# Altium PCB 小四轴.PcbDoc
Units mm, origin at the board's own origin, x right, y up, seen from the top; angles counter-clockwise.
Board outline 152.4 x 101.6 mm, 2 copper layers (Top Layer, Bottom Layer); 77 components, 60 nets, 283 pads, 162 vias.
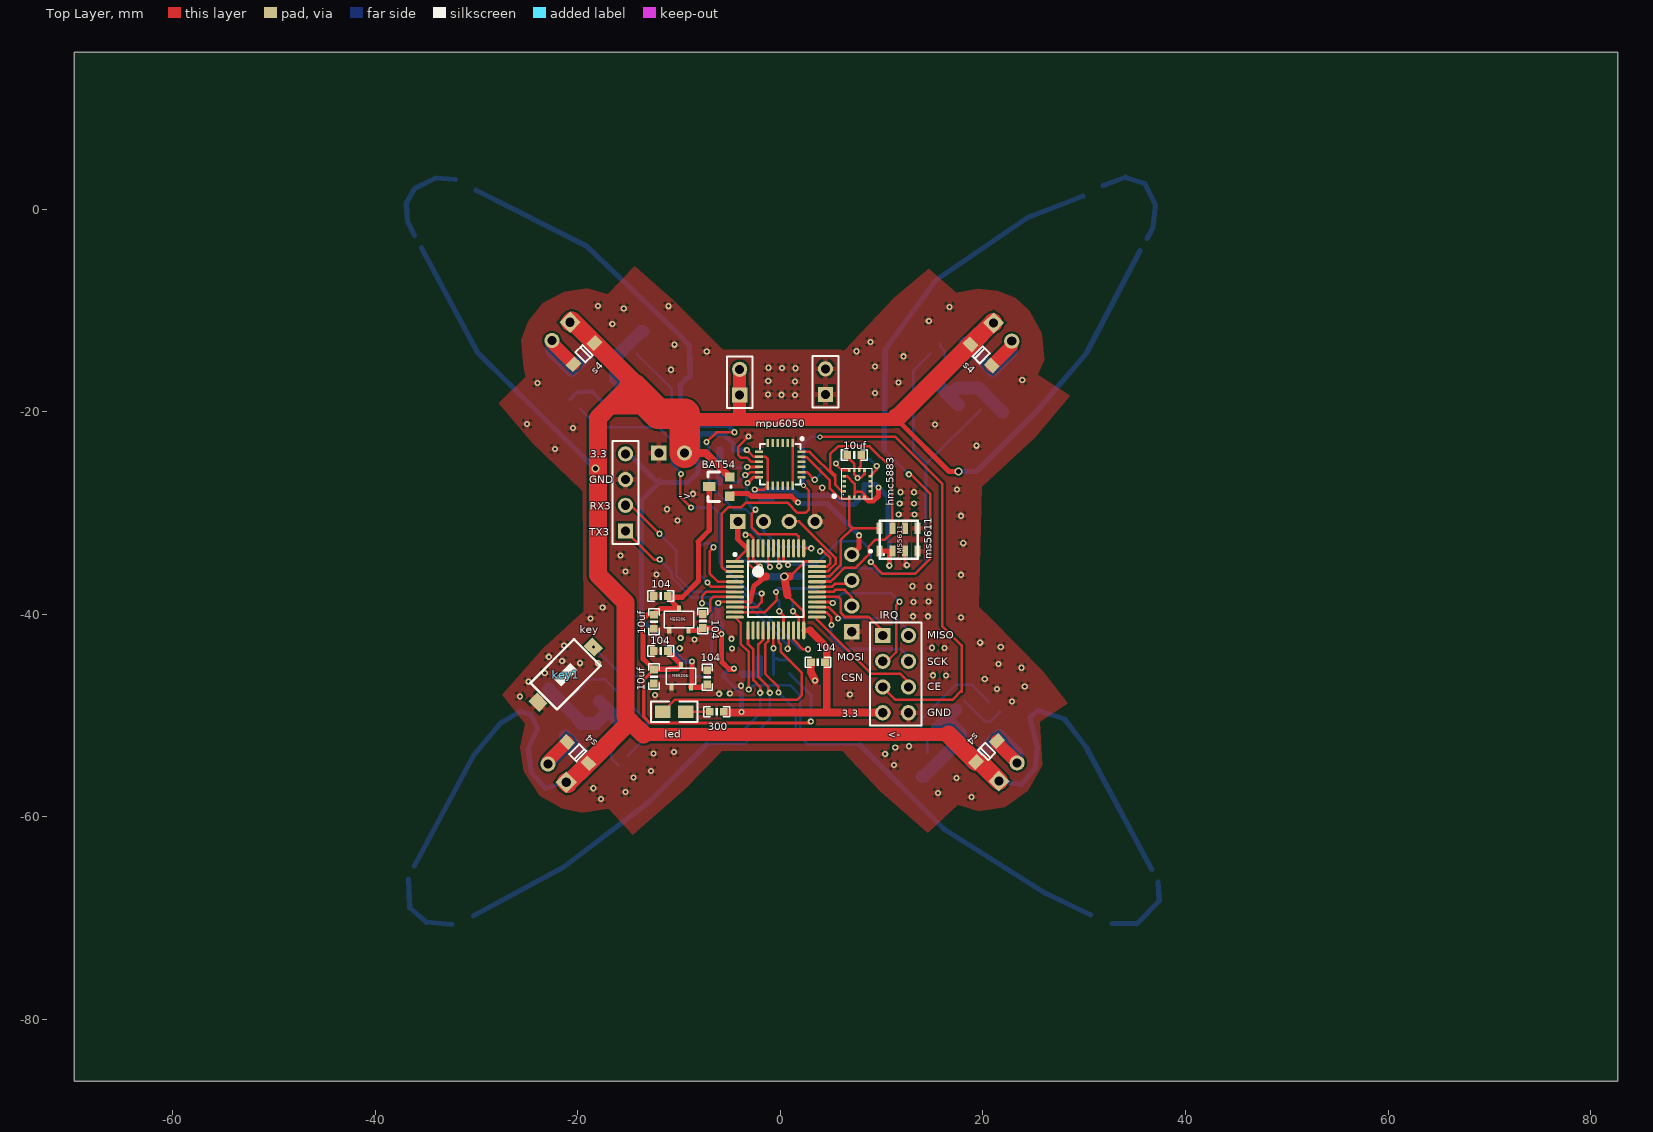
[diagram p0: Top Layer view]
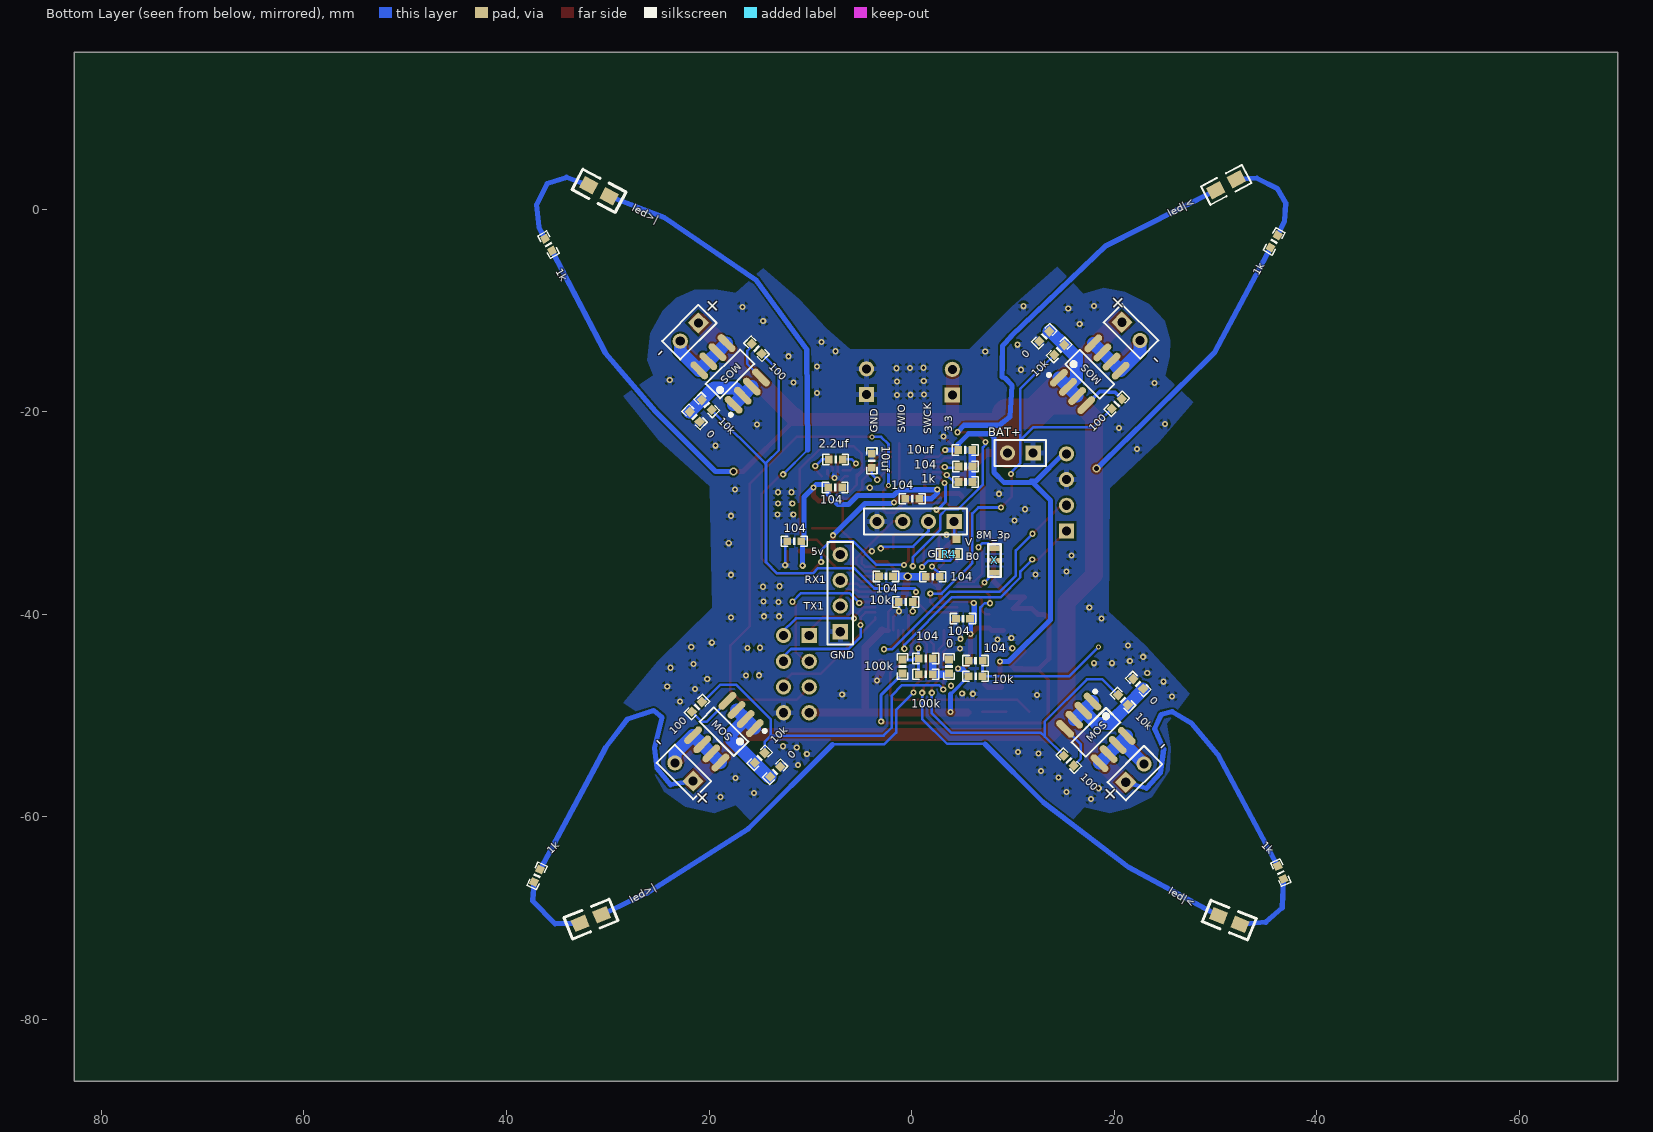
[diagram p1: Bottom Layer view, seen from below]

## Layer stack, top to bottom
Top Layer: signal copper 0.0356
Dielectric: dielectric 0.32, FR-4, Dk 4.8
Bottom Layer: signal copper 0.0356

## Board outline
-69.726,-86.105 82.674,-86.105 82.674,15.495 -69.726,15.495

## Design rules (kind name [scope] priority, off if disabled: settings)
Clearance futong [All vs InPolygon] p1: gap=0.203
MinimumSolderMaskSliver [All] p1: minsoldermaskwidth=0
PolygonConnect [All] p1: connectstyle=Relief reliefconductorwidth=0.508 reliefentries=4 polygonreliefangle="90 Angle" airgapwidth=0.254
RoutingVias [All] p1: holewidth=0.3 width=0.5 viastyle="Through Hole" minholewidth=0.3 minwidth=0.5 maxholewidth=0.8 maxwidth=1.3
SilkToSilkClearance [All] p1: silktosilkclearance=0
SilkToSolderMaskClearance [IsPad] p1: minsilkscreentomaskgap=0 clearancetoexposedcopper=TRUE
SolderMaskExpansion [All] p1: expansion=0.102
Width [All] p1: maxlimit=4 minlimit=0.254 preferedwidth=0.254
25 further rules are at their usual default settings.

## Classes and differential pairs
component class 小四轴: *1 arctory1 C1 C2 C3 C4 C5 C6 C7 C8 C9 C10 C11 C14 C16 C17 CRYSTAL1 D1 D6 D7 D8 D9 JP1 JP2 JP4 JP6 JP7 ms5611 nrf R1 R2 R4 R5 R6 R10 R11 R13 R14 R15 R16 R17 R18 R19 R20 U1 U2 U3

## Components (designator, comment, footprint, x,y, rotation, side; value= is the part's Value field where it differs from the comment)
*1 "HMC5883L" hmc5883l 9.05,-28.599 r90 top
arctory1 "MS5611" MS5611 12.301,-29.509 r90 top
C1 "10uf" 0603P -12.497,-40.731 r90 top
C2 "104" 0603P -11.829,-38.196 r0 top
C3 "104" 0603P -7.663,-40.66 r270 top
C4 "104" 0603P -0.069,-28.595 r180 bottom
C5 "10UF" 0603P -5.301,-23.769 r180 bottom
C6 "10uf" 0603P 7.3,-24.275 r180 top
C7 "104" 0603p 11.59,-32.786 r0 bottom
C8 "10uf" 0603P -12.497,-46.141 r90 top
C9 "104" 0603P -11.811,-43.626 r0 top
C10 "104" 0603P -7.232,-46.222 r270 top
C11 "104" 0603P 7.55,-27.475 r180 bottom
C12 "10UF" 0603P 3.919,-24.835 r270 bottom
C13 "104" 0603P -5.327,-25.394 r180 bottom
C14 "2.2uf" 0603P 7.5,-24.707 r180 bottom
C17 "104" 0603P -6.319,-44.573 r180 bottom
C18 "104" 0603P -1.402,-44.37 r0 bottom
C22 "104" 0603P 3.7,-44.725 r0 top
C23 "104" 0603P 2.525,-36.25 r180 bottom
C24 "104" 0603P -2.1,-36.3 r0 bottom
C25 "104" 0603P -5.075,-40.425 r180 bottom
D1 "BAT54C" SOT23 -6.012,-27.401 r90 top
D2 "发光二极管" 0805#1 -9.34,-49.626 r180 top
D3 "发光二极管" 0805#1 -32.075,2.95 r332 bottom
D4 "发光二极管" 0805#2 31.875,2.35 r208 bottom
D5 "发光二极管" 0805#2 32.725,-70.525 r158 bottom
D6 "S4" LC-SOD-123 -19.397,-14.261 r225 top
D7 "S4" LC-SOD-123 19.824,-14.383 r315 top
D8 "S4" LC-SOD-123 20.358,-53.544 r45 top
D9 "S4" LC-SOD-123 -20.012,-53.661 r135 top
D10 "发光二极管" 0805#2 -32.425,-70.625 r22 bottom
HC1 "HC05" HDR1X4 -15.3,-31.775 r90 top
JP1 "BAT" HDR1X2 -12.007,-24.073 r0 bottom
JP2 "HEADER 4" HDR1X4 -4.209,-30.83 r0 bottom
JP3 "HEADER 4" HDR1X4 7.043,-41.726 r90 bottom
JP4 "MOTOR1" HDR1X2 -20.768,-11.163 r225 bottom
JP5 "MOTOR2" HDR1X2 21.043,-11.234 r315 bottom
JP6 "MOTOR3" HDR1X2 21.577,-56.465 r45 bottom
JP7 "MOTOR4" HDR1X2 -21.155,-56.582 r135 bottom
key1 "KEY" 贴片按键6.1x3.7 -17.771,-45.079 r225 top
nrf "nrf24l01" HDR2X4 10.1,-42.1 r270 top
P4 "Header 2" HDR1X2 4.45,-18.3 r90 top
P5 "Header 2" HDR1X2 -4.025,-18.35 r90 top
Q1 "SI2302\" LC-SOIC-8_150mil -17.593,-16.293 r225 bottom
Q2 "SI2302\" LC-SOIC-8_150mil 17.919,-16.263 r135 bottom
Q3 "SI2302\" LC-SOIC-8_150mil 18.529,-51.588 r45 bottom
Q4 "SI2302\" LC-SOIC-8_150mil -18.208,-51.654 r315 bottom
R1 "0" 0603P -3.701,-45.155 r90 bottom
R2 "1k" 0603P -5.327,-26.944 r0 bottom
R3 "10k" 0603P 0.575,-38.775 r180 bottom
R4 "10k" 0603P -3.725,-34.05 r180 bottom
R5 "10k" 0603P -6.319,-46.122 r0 bottom
R6 "300" 0603P -6.292,-49.626 r0 top
R7 "1k" 0603P -35.8,-3.175 r300 bottom
R8 "1k" 0603P 35.85,-3.5 r240 bottom
R9 "1k" 0603P 36.975,-65.825 r115 bottom
R10 "100K" 0603P 0.896,-45.155 r270 bottom
R11 "100K" 0603P -1.402,-45.919 r0 bottom
R12 "1k" 0603P -36.45,-65.5 r65 bottom
R13 "100" 0603P -20.26,-19.214 r315 bottom
R14 "100" 0603P 15.303,-13.774 r225 bottom
R15 "100" 0603P 21.196,-49.15 r135 bottom
R16 "100" 0603P -15.525,-54.45 r45 bottom
R17 "10k" 0603P -14.575,-13.9 r135 bottom
R18 "10k" 0603P 20.225,-19.325 r45 bottom
R19 "10k" 0603P 15,-54.175 r315 bottom
R20 "10k" 0603P -20.875,-48.45 r225 bottom
R22 "0" 0603P -13.1,-12.55 r315 bottom
R23 "0" 0603P 21.425,-20.5 r225 bottom
R24 "0" 0603P 13.475,-55.55 r135 bottom
R25 "0" 0603P -22.375,-46.875 r45 bottom
U1 "ME6206" ME6206 -11.481,-41.315 r0 top
U2 "MPU6050" QFN24 -0.018,-25.202 r270 top
U3 "ME6206" ME6206 -11.252,-46.903 r0 top
U4 "STM32F103C8T6" LQFP48_N -0.45,-37.535 r0 top
X "XTAL" 三脚晶振 -8.2,-33.475 r270 bottom

## Footprints (in the part's own frame and the unit in brackets; to place one, negate y for a bottom-side part, rotate by r counter-clockwise, add the part's x,y. Pads: shape width x height; smd on the part's side, far side on the other; paste and mask are expansions set on the pad)
0603P [mil]
  rect 30x30 smd: 1(-27,0) 2(27.5,-0.06)
  silkscreen extent -50,-20 50,20
0603p [mil]
  rect 30x30 smd: 1(-27,0) 2(27.5,-0.06)
  silkscreen extent -50,-20 50,20
0805#1 [mil]
  rect 60x50 smd: 1(0,0) 2(90,0)
  silkscreen extent -45,-40 135,40
0805#2 [mil]
  rect 60x50 smd: 1(0,-0.06) 2(90,-0.06)
  silkscreen extent -50,-45 140,45
HDR1X2 [mm] "Connector; Header; 2 Position"
  rect 1.5x1.5 hole 0.9: 1(0,0)
  round 1.5 hole 0.9: 2(2.54,0)
  silkscreen extent -1.27,-1.27 3.81,1.27
HDR1X4 [mm]
  rect 1.5x1.5 hole 0.9: 1(0,0)
  round 1.5 hole 0.9: 2(2.54,0) 3(5.08,0) 4(7.62,0)
  silkscreen extent -1.27,-1.27 8.89,1.27
HDR2X4 [mm] "Connector; Header; 4x2 Position"
  rect 1.5x1.5 hole 0.9: 1(0,0)
  round 1.5 hole 0.9: 2(0,2.54) 3(2.54,0) 4(2.54,2.54) 5(5.08,0) 6(5.08,2.54) 7(7.62,0) 8(7.62,2.54)
  silkscreen extent -1.27,-1.27 8.89,3.81
hmc5883l [mm]
  rect 0.325x0.25 smd mask+0.051: 1(0.175,2.25) 2(0.175,1.75) 3(0.175,1.25) 4(0.175,0.75) 9(2.825,0.75) 10(2.825,1.25) 11(2.825,1.75) 12(2.825,2.25)
  rect 0.25x0.325 smd mask+0.051: 5(0.75,0.175) 6(1.25,0.175) 7(1.75,0.175) 8(2.25,0.175) 13(2.25,2.75) 14(1.75,2.75) 15(1.25,2.75) 16(0.75,2.75)
  silkscreen extent 0,0 3,3
LC-SOD-123 [mm]
  rect 1.25x1 smd: 1(1.475,0) 2(-1.475,0)
  silkscreen extent -0.5,-0.7 0.5,0.7, body extent -1.85,-0.77 1.85,0.78, height 1.35
LC-SOIC-8_150mil [mm]
  oval 0.7x2.2 smd: 1(-1.905,-2.4) 2(-0.635,-2.4) 3(0.635,-2.4) 4(1.905,-2.4) 5(1.905,2.4) 6(0.635,2.4) 7(-0.635,2.4) 8(-1.905,2.4)
  silkscreen extent -2.95,-3.05 2.4,1
LQFP48_N [mm]
  oval 1.8x0.3 smd: 1(-4.05,2.75) 2(-4.05,2.25) 3(-4.05,1.75) 4(-4.05,1.25) 5(-4.05,0.75) 6(-4.05,0.25) 7(-4.05,-0.25) 8(-4.05,-0.75) 9(-4.05,-1.25) 10(-4.05,-1.75) 11(-4.05,-2.25) 12(-4.05,-2.75) 25(4.05,-2.75) 26(4.05,-2.25) 27(4.05,-1.75) 28(4.05,-1.25) 29(4.05,-0.75) 30(4.05,-0.25) 31(4.05,0.25) 32(4.05,0.75) 33(4.05,1.25) 34(4.05,1.75) 35(4.05,2.25) 36(4.05,2.75)
  oval 0.3x1.8 smd: 13(-2.75,-4.05) 14(-2.25,-4.05) 15(-1.75,-4.05) 16(-1.25,-4.05) 17(-0.75,-4.05) 18(-0.25,-4.05) 19(0.25,-4.05) 20(0.75,-4.05) 21(1.25,-4.05) 22(1.75,-4.05) 23(2.25,-4.05) 24(2.75,-4.05) 37(2.75,4.05) 38(2.25,4.05) 39(1.75,4.05) 40(1.25,4.05) 41(0.75,4.05) 42(0.25,4.05) 43(-0.25,4.05) 44(-0.75,4.05) 45(-1.25,4.05) 46(-1.75,4.05) 47(-2.25,4.05) 48(-2.75,4.05)
  silkscreen extent -4.17,-2.75 2.75,3.57, body extent -4.5,-4.51 4.5,4.49, height 1.56
ME6206 [mm]
  rect 0.4x0.6 smd mask+0.051: 1(0.5,-0.3) 2(2.4,-0.3) 3(1.45,1.9)
  silkscreen extent 0,0 2.9,1.6
MS5611 [mm]
  rect 1.1x0.6 smd: 1(-4.25,2.5) 2(-4.25,1.25) 3(-4.25,0) 4(-4.25,-1.25) 5(-2,-1.25) 6(-2,0) 7(-2,1.25) 8(-2,2.5)
  silkscreen extent -5,-1.25 -1.25,2.5
QFN24 [mm]
  rect 0.8x0.25 smd: 1(-2.101,1.25) 2(-2.101,0.75) 3(-2.101,0.25) 4(-2.101,-0.25) 5(-2.101,-0.75) 6(-2.101,-1.25) 13(2.101,-1.25) 14(2.101,-0.75) 15(2.101,-0.25) 16(2.101,0.25) 17(2.101,0.75) 18(2.101,1.25)
  rect 0.25x0.8 smd: 7(-1.25,-2.101) 8(-0.75,-2.101) 9(-0.25,-2.101) 10(0.25,-2.101) 11(0.75,-2.101) 12(1.25,-2.101) 19(1.25,2.101) 20(0.75,2.101) 21(0.25,2.101) 22(-0.25,2.101) 23(-0.75,2.101) 24(-1.25,2.101)
  silkscreen extent -2.66,-2 2,2.28
SOT23 [mil]
  rect 36x36 smd: B(-37.5,-40) E(37.5,-40)
  rect 36x50 smd: C(0.5,40)
  silkscreen extent -58,-45 58,45
三脚晶振 [mm]
  rect 0.5x1.3 smd: 1(0,0) 2(2.4,0) 3(1.2,0)
  silkscreen extent -0.4,-0.63 2.8,0.63
贴片按键6.1x3.7 [mm]
  rect 1.2x1.5 smd: 1(-0.8,-1.8) 2(6.9,-1.8)
  silkscreen extent 0,-3.7 6.1,0

## Part data
C1 C2 C3 C4 C5 C6 C7 C8 C9 C10 C11 C12 C13 C14 C17 C18 C22 C23 C24 C25: library part C_N, "Capacitor"
D6 D7 D8 D9: library part TUNNEL, "Tunnel FDiode"
HC1: library part "Header 4", "Header, 4-Pin"
JP1 JP4 JP5 JP6 JP7: library part "HEADER 2"
JP2 JP3: "4 Pin Header"
P4 P5: "Header, 2-Pin"
Q1 Q2 Q3 Q4: library part "MOSFET N"
R1 R2 R3 R4 R5 R6 R7 R8 R9 R10 R11 R12 R13 R14 R15 R16 R17 R18 R19 R20 R22 R23 R24 R25: library part RES
U2: "9轴运动处理传感器"
U4: "STM32 ARM-based 32-bit MCU with 64 Kbytes Flash, 48-pin LQFP, Industrial Temperature"
X: library part XTAL_3P

## Free pads (board coordinates)
  rect 0.8x0.8 smd far side: 1(-4.425,-32.55)

## Via types
v1: diameter 0.61, hole 0.305, Top Layer to Bottom Layer, 156 vias
v2: diameter 0.8, hole 0.5, Top Layer to Bottom Layer, 3 vias
v3: diameter 0.5, hole 0.3, Top Layer to Bottom Layer, 3 vias

## Nets (pads, with @x,y where several pads share a name; then routed paths per layer and width w, separated by ;. In a path a pad name is that pad's centre, name@x,y a point inside that pad or via, vN(x,y) a via of type N, cw(c..) or ccw(c..) an arc to the next point about the centre after c; other vN are vias at no path point)
AD: C18.2 R10.1 R11.2 U4.18 | length 6
  Top Layer w0.254: v1(-0.7,-43.348) U4.18
  Bottom Layer w0.305: R11.2 C18.2 ; v1@-0.7,-43.373 -0.7,-44.364 C18.2 ; R10.1@0.947,-44.495 -0.17,-44.495 -0.297,-44.368 C18.2
AGND: C18.1 R1.1 R11.1 | length 4.9
  Bottom Layer w0.254: R1.1 -2.166,-45.841 R11.1
  Bottom Layer w0.762: R1.1@-3.726,-45.867 -3.674,-45.919 R11.1 C18.1
AGND1: Q1.1 Q1.2 Q1.3 R17.2 R22.1 | length 9.6
  Bottom Layer w1.27: Q1.3 Q1.2 ; Q1.1 Q1.2 ; R22.1 -13.728,-12.065 R17.2 -16.138,-14.475 -16.275,-14.475 -16.275,-16.714 Q1.2
AGND2: Q2.1 Q2.2 Q2.3 R18.2 R23.1 | length 9.1
  Bottom Layer w1.27: Q2.3 Q2.2 ; Q2.1 Q2.2 ; R18.2@20.725,-18.83 R18.2 ; R23.1 21.903,-20.015 R18.2 ; Q2.2 17.443,-17.637 19.525,-17.637 R18.2
AGND3: Q3.1 Q3.2 Q3.3 R19.2 R24.1 | length 10.5
  Bottom Layer w1.27: R24.1 14.115,-56.035 17.8,-52.35 17.8,-51.757 Q3.2 ; Q3.1 Q3.2 ; Q3.3 Q3.2
AGND4: Q4.1 Q4.2 Q4.3 R20.2 R25.1 | length 10.5
  Bottom Layer w1.27: R25.1 -22.86,-47.453 R20.2 -19.7,-50.613 -19.7,-50.775 -18.227,-50.775 Q4.2 ; Q4.1 Q4.2 ; Q4.3 Q4.2
BOOT0: R4.2 U4.44 | length 5.9
  Top Layer w0.254: U4.44 -1.2,-35.136 -1.212,-35.148 v1(-1.034,-35.326)
  Bottom Layer w0.254: R4.2 -4.423,-34.077 -3.8,-34.7 -1.66,-34.7 v1(-1.034,-35.326)
GND: *1.9 *1.11 arctory1.3 arctory1.4 arctory1.5 C1.1 C2.1 C3.1 C4.1 C5.2 C6.2 C7.2 C8.1 C9.1 C10.1 C11.2 C12.1 C13.2 C17.1 C22.1 C23.1 C24.1 C25.1 HC1.3 JP1.1 JP2.4 JP3.1 key1.2 nrf.8 P4.1 P4.2 R1.2 R2.1 R3.1 R4.1 R22.2 R23.2 R24.2 R25.2 U1.1 U2.1 U2.9 U2.18 U3.1 U4.8 U4.23 U4.35 U4.47 X.3 | length 38.4
  Top Layer w0.254: C3.1 -7.282,-39.974 -6.918,-39.61 -6.918,-38.557 -6.636,-38.275 -6.275,-38.275 -6.265,-38.285 U4.8 ; v1(-3.45,-32.15) -3.05,-32.15 -3.025,-32.125 -2.7,-32.45 U4.47 -2.7,-34.6 v1(-2.025,-35.275) ; v1(-3.15,-22.45) -4.18,-23.48 -4.18,-24.245 -3.875,-24.55 -3.275,-24.55 -2.873,-24.952 U2.9 ; v1(1.227,-39.694) 1.8,-40.268 U4.23 ; U2.18 U2.1 ; U4.35 4.615,-35.285 4.925,-34.975 4.925,-34.45 4.25,-33.775 v1(3.925,-33.775) ; C6.2 6.602,-24.479 7.3,-25.178 *1.11 7.3,-26.2 7.625,-26.525 7.925,-26.525 8.3,-26.15 *1.9 ; arctory1.3 12.301,-34.97 v1(12.479,-35.148)
  Top Layer w0.762: C22.1 3,-45.7 v1(3.425,-46.525)
  Bottom Layer w0.254: v1(-3.15,-22.45) v1@-3.125,-22.425 ; C24.1 -2.786,-36.036 v1(-2.025,-35.275) ; v1(1.227,-39.694) R3.1@1.227,-38.602 ; v1(7.6,-26.525) 7.775,-26.35 7.775,-26.3 7.725,-26.25 7.75,-26.225 ; C7.2 12.479,-32.974 v1(12.479,-35.148)
  Bottom Layer w0.762: R2.1 -6,-26.931 C5.2
  other v1: -17.725,-58.25 18.875,-58.025 15.55,-57.65 -15.3,-57.55 -18.475,-57.175 17.4,-56.15 -14.5,-56.1 -12.775,-55.475 11.225,-54.875 10.342,-53.809 -12.55,-53.75 -10.5,-53.6 11.34,-53.142 12.7,-53.025 22.875,-48.6 -25.725,-48.1 -12.375,-47.975 6.85,-47.925 -6.05,-47.85 -5,-47.825 21.379,-47.379 24.125,-47.125 -3.9,-47.05 -24.877,-46.654 20.175,-46.4 16.35,-46.05 15.075,-46.025 -23.275,-45.8 23.8,-45.275 21.525,-44.9 -19.8,-44.825 -18.025,-44.825 -21.55,-44.6 -22.871,-44.198 -4.775,-43.375 -9.95,-43.35 16.2,-43.325 14.95,-43.3 21.75,-43.225 -21.371,-43.073 19.725,-42.8 -8.5,-42.5 -4.833,-42.421 -9.85,-42.35 -18.75,-40.4 17.825,-40.325 13.1,-40.2 14.575,-40.2 -17.55,-39.325 13.15,-38.775 14.625,-38.75 14.675,-37.275 13.05,-37.225 17.825,-36.1 -12.25,-36.075 -15.3,-35.775 -15.8,-34.2 18.05,-32.975 -10.15,-30.725 17.825,-30.275 11.675,-30.15 13.225,-30.15 -11.2,-29.625 11.775,-29.05 13.2,-29.05 -8.625,-28.1 11.85,-27.95 13.2,-27.95 17.425,-27.675 4.125,-27.5 -22.275,-23.675 19.375,-23.35 -20.475,-21.6 15.25,-21.25 -25.025,-21.2 1.425,-18.35 -1.225,-18.3 0.1,-18.325 9.35,-18.15 -24,-17.15 11.65,-17.1 1.45,-17.025 -1.2,-16.975 23.875,-16.875 -10.8,-15.85 1.475,-15.7 0.15,-15.675 -1.175,-15.65 9.35,-15.525 12.15,-14.525 -7.275,-14.05 7.525,-14.025 -10.475,-13.375 8.9,-13.1 -16.6,-11.325 14.65,-11.025 -15.475,-9.8 16.7,-9.65 -11.05,-9.575 -18.025,-9.55
INT: U2.12 U4.38 | length 12.3
  Top Layer w0.254: v1(-2.475,-29.668) -2.475,-29.75 -2.837,-30.112 -2.837,-31.389 -2.126,-32.1 1.582,-32.1 1.8,-32.318 U4.38
  Top Layer w0.305: v1(-3.244,-27.02) -2.676,-26.452 U2.12
  Bottom Layer w0.305: v1(-3.244,-27.02) -3.345,-27.02 -3.345,-28.899 v1@-2.677,-29.568
LED1: D3.2 U4.42 | length 60.5
  Top Layer w0.254: v1(-7.3,-23) -6.325,-22.025 v1(-4.55,-22.025) ; U4.42 -0.2,-35.175 v1(-0.125,-35.25)
  Bottom Layer w0.254: v1(-7.3,-23) -7.3,-23.25 -7.04,-23.51 -7.04,-27.185 -4.6,-29.625 -3.425,-29.625 -2.85,-30.2 -2.85,-31.625 -0.125,-34.35 v1(-0.125,-35.25)
  Bottom Layer w0.508: D3.2 -19.15,-3.625 -9.85,-12.525 -8.975,-13.5 -8.96,-15.404 -8.925,-16.55 -9.282,-16.716 -9.9,-17.4 -9.725,-20.5 -8.65,-21.325 -5.186,-21.333 v1(-4.55,-22.025)
LED2: D4.2 U4.41 | length 67.2
  Top Layer w0.254: U4.41 0.3,-34.675 v1(0.75,-35.125) ; v1(8.925,-34.85) 10.075,-36 13.3,-36 14.775,-34.525 14.775,-28.075 v1@12.875,-26.175
  Bottom Layer w0.254: v1(0.75,-35.125) 3.45,-35.125 5.793,-32.782 7.995,-32.782 8.002,-32.775 8.925,-33.698 v1(8.925,-34.85) ; 10.25,-23.75 v1(12.675,-26.175)
  Bottom Layer w0.508: 10.25,-23.75 10.35,-13.85 15.275,-7.075 24.425,-0.825 D4.2
LED3: D5.2 U4.17 | length 46.8
  Top Layer w0.254: U4.17 -1.2,-42.652 -1.499,-42.951 -1.499,-45.876 -0.2,-47.175 v1(-0.2,-47.725)
  Bottom Layer w0.254: v1(-0.2,-47.725) 1.521,-49.446 1.521,-51.671 2.7,-52.85 7.8,-52.85
  Bottom Layer w0.508: 7.8,-52.85 16.125,-61.175 26.225,-67.575 D5.2
LED4: D10.2 U4.16 | length 45.6
  Top Layer w0.254: U4.16 -1.723,-41.608 -1.723,-42.533 -2.002,-42.812 -2.012,-42.812 -2.175,-42.975 -2.175,-46.2 -1.2,-47.175 -1.2,-47.6 v1(-1.05,-47.75)
  Bottom Layer w0.254: -13.1,-58.65 -13,-58.55 ; -7.25,-52.8 -3.525,-52.8 -1.05,-50.325 v1(-1.05,-47.75)
  Bottom Layer w0.508: D10.2 -21.4,-64.95 -13,-58.55 -7.25,-52.8
LED_SIGN: D2.2 U4.19 | length 21.8
  Top Layer w0.254: D2.2 -10.45,-48.45 -2.366,-48.45 -2.364,-48.452 1.648,-48.452 2.1,-48 2.1,-45.75 0.05,-43.7 0.05,-42.969 -0.177,-42.743 -0.177,-41.608 U4.19
MISO: nrf.2 U4.27 | length 10.4
  Top Layer w0.254: U4.27 4.751,-39.285 5.697,-40.231 v1(5.697,-40.406)
  Bottom Layer w0.254: v1(5.697,-40.406) 11.412,-40.406 nrf.2@12.873,-41.867
MOSI: nrf.3 U4.28 | length 15.5
  Top Layer w0.254: U4.28 v1@5.071,-38.785 ; v1@5.165,-38.88 v1@5.167,-38.882 ; nrf.3@10.315,-44.855 11.425,-43.745 11.425,-39.104 v1(11.771,-38.758)
  Bottom Layer w0.254: v1(5.164,-38.882) 6.129,-37.916 10.929,-37.916 v1(11.771,-38.758)
Net*1_8: *1.8 C14.1 | length 2.8
  Top Layer w0.254: *1.8 9.507,-25.716 v1(9.507,-25.367)
  Bottom Layer w0.254: C14.1 8.847,-24.707 v1(9.507,-25.367)
Net*1_10: *1.10 C6.1 | length 1.6
  Top Layer w0.254: *1.10 7.8,-25.524 7.95,-25.373 C6.1@7.95,-24.275
Net*1_12: *1.12 C14.2 | length 3.1
  Top Layer w0.254: v1(5.494,-25.113) 5.494,-25.215 6.053,-25.774 *1.12
  Bottom Layer w0.254: v1(5.494,-25.113) 5.899,-24.708 C14.2
NetC12_2: C12.2 U2.20 | length 3.1
  Top Layer w0.254: U2.20 2.6,-25.952 3.386,-26.737 v1(3.386,-26.715)
  Bottom Layer w0.254: v1(3.386,-26.715) 3.921,-26.18 C12.2
NetC13_1: C13.1 U2.10 | length 2.7
  Top Layer w0.254: v1(-3.276,-25.452) U2.10
  Bottom Layer w0.254: C13.1@-4.692,-25.394 C13.1@-4.677,-25.379 ; C13.1 -4.656,-25.379 C13.1@-4.677,-25.379 ; v1(-3.276,-25.452) -3.345,-25.521 -4.535,-25.521 C13.1@-4.677,-25.379
NetC17_2: C17.2 key1.1 R5.1 U4.7 | length 24.8
  Top Layer w0.254: v1(-7.74,-38.907) -7.74,-38.19 -7.335,-37.785 U4.7
  Bottom Layer w0.254: v3@-18.456,-43.219 -15.553,-46.122 R5.1 C17.2@-7.005,-44.587 ; v1(-7.74,-38.907) -7.206,-38.907 -6.801,-39.312 -6.801,-44.359 C17.2 ; C17.2@-6.789,-44.828 C17.2@-6.776,-44.841
  other v3: -18.478,-43.241
NetD2_1: D2.1 R6.1 | length 2.4
  Top Layer w0.254: D2.1 R6.1
NetD3_1: D3.1 R7.1 | length 9.3
  Bottom Layer w0.508: R7.1 -36.825,-1.2 -36.95,0.6 -36.125,2.05 -34.1,3.075 D3.1
NetD4_1: D4.1 R8.1 | length 10.2
  Bottom Layer w0.508: D4.1 34.075,3.15 35.975,2.525 37.025,0.475 36.8,-1.775 R8.1
NetD5_1: D5.1 R9.1 | length 7.5
  Bottom Layer w0.508: D5.1 35.2,-70.55 37.4,-68.3 R9.1
NetD6_1: D6.1 JP4.2 Q1.5 Q1.6 Q1.7 Q1.8 | length 10.8
  Top Layer w1.27: JP4.2 -22.564,-13.18 D6.1
  Bottom Layer w1.27: JP4.2 -22.564,-14.016 Q1.5 Q1.6 Q1.7 Q1.8
NetD7_1: D7.1 JP5.2 Q2.5 Q2.6 Q2.7 Q2.8 | length 10.7
  Top Layer w1.27: D7.1 22.839,-13.454 JP5.2
  Bottom Layer w1.27: Q2.5 Q2.6 Q2.7 Q2.8 22.839,-14.037 JP5.2
NetD8_1: D8.1 JP6.2 Q3.5 Q3.6 Q3.7 Q3.8 | length 10.3
  Top Layer w1.27: D8.1 21.401,-52.696 JP6.2
  Bottom Layer w1.27: Q3.8 Q3.7 Q3.6 Q3.5 23.373,-53.738 JP6.2
NetD9_1: D9.1 JP7.2 Q4.5 Q4.6 Q4.7 Q4.8 | length 10.2
  Top Layer w1.27: JP7.2 -22.951,-54.514 D9.1
  Bottom Layer w1.27: JP7.2 -21.252,-53.087 Q4.8 Q4.7 Q4.6 Q4.5
NetD10_1: D10.1 R12.1 | length 7.6
  Bottom Layer w0.508: R12.1 -36.6,-68.975 -34.975,-70.4 D10.1
NetQ1_1: Q1.4 R13.1 | length 4.4
  Bottom Layer w0.381: R13.1 -20.091,-18.075 -19.5,-18.075 -19.425,-18 -18.581,-18 Q1.4
NetQ2_1: Q2.4 R14.1 | length 4.1
  Bottom Layer w0.254: Q2.4 16.225,-15.263 16.225,-14 15.788,-13.563 R14.1
NetQ3_1: Q3.4 R15.1 | length 4.8
  Bottom Layer w0.254: Q3.4 20.26,-50.625 20.691,-50.625 R15.1
NetQ4_1: Q4.4 R16.1 | length 4.6
  Bottom Layer w0.254: R16.1 -16.725,-54.22 -16.725,-52.865 Q4.4
NetR2_2: R2.2 U2.11 | length 2.9
  Top Layer w0.254: v1(-3.472,-26.232) -3.241,-26.232 -2.96,-25.952 U2.11
  Bottom Layer w0.254: R2.2 -4.182,-26.942 v1(-3.472,-26.232)
NetR3_2: R3.2 U4.20 | length 3.2
  Top Layer w0.254: v1(-0.12,-39.694) 0.3,-40.114 U4.20
  Bottom Layer w0.254: R3.2@-0.158,-38.604 -0.12,-38.642 v1(-0.12,-39.694)
NetU4_5: U4.5 X.1 | length 7.6
  Top Layer w0.254: v1(-6.6,-33.375) -7,-33.775 -7,-35.95 -6.165,-36.785 U4.5
  Bottom Layer w0.254: X.1 -8.05,-33.475 -7.537,-32.962 -7.013,-32.962 v1(-6.6,-33.375)
NetU4_6: U4.6 X.2 | length 4.3
  Top Layer w0.254: v1@-7.181,-36.9 -6.796,-37.285 U4.6
  Bottom Layer w0.254: X.2 v1(-7.2,-36.875)
PWM1: R13.2 R17.1 U4.10 | length 44.8
  Top Layer w0.254: v1(-9.825,-26.15) -9.9,-26.225 -9.9,-28.375 v1(-8.825,-29.45) ; U4.10 -2.335,-39.285 -1.85,-38.8 v1(-1.85,-37.95)
  Bottom Layer w0.254: R13.2 -17.947,-21.525 -12.025,-21.525 -10.725,-22.825 ; R17.1@-14.187,-14.289 -10.725,-17.751 -10.725,-20.15 -10.725,-25.1 -9.825,-26 v1(-9.825,-26.15) ; v1(-8.825,-29.45) -6.601,-29.45 -6.012,-30.039 -6.012,-34.913 -2.975,-37.95 v1(-1.85,-37.95)
PWM2: R14.2 R18.1 U4.11 | length 51.4
  Top Layer w0.254: U4.11 -1.535,-39.785 -0.35,-38.6 v1@-0.35,-37.8
  Bottom Layer w0.254: v1(-0.45,-37.8) -0.45,-37.6 -0.3,-37.45 3.675,-37.45 5.675,-35.45 9.225,-35.45 9.725,-35.95 13.275,-35.95 14.375,-34.85 14.375,-25.075 13.1,-23.8 13.1,-15.979 R14.2 ; 14.425,-25.125 R18.1
PWM3: R15.2 R19.1 U4.12 | length 41.2
  Top Layer w0.254: U4.12 -3.925,-40.86 -3.925,-42.925 -3.125,-43.725 v1(-3.125,-47.425)
  Bottom Layer w0.254: v1(-3.125,-47.425) -2.7,-47 0.925,-47 1.975,-48.05 1.975,-51.2 2.75,-51.975 13.887,-51.975 ; R19.1 14.515,-52.603 13.887,-51.975 ; R15.2@20.592,-48.657 18.91,-46.975 17.3,-46.975 13.887,-50.388 13.887,-51.975
PWM4: R16.2 R20.1 U4.13 | length 34.5
  Top Layer w0.254: U4.13 -3.2,-42.95 -2.671,-43.479 -2.671,-46.504 -2,-47.175 v1(-2,-47.75)
  Bottom Layer w0.254: R20.1 -18.85,-46.425 -17.325,-46.425 -13.15,-50.6 -13.15,-52.073 ; R16.2 -13.15,-52.073 ; v1(-2,-47.75) -2,-49.775 -3.9,-51.675 -12.752,-51.675 -13.15,-52.073
RXD: JP3.3 U4.31 | length 3.7
  Top Layer w0.254: U4.31 3.623,-37.262 5.106,-37.262 5.367,-37.002 6.688,-37.002 JP3.3
RXD_B: HC1.1 U4.21 | length 23.3
  Top Layer w0.254: HC1.1 -12.475,-34.6 v1(-11.92,-34.6) ; v1(0.715,-43.399) 0.8,-43.314 U4.21
  Bottom Layer w0.254: v1@-11.931,-34.589 v1(-11.92,-34.6) -10.751,-35.769 -10.751,-36.342 -8.768,-38.325 -6.399,-38.325 -6.378,-38.305 -3.995,-38.305 0.715,-43.015 v1(0.715,-43.399)
SCL: *1.1 arctory1.8 U2.23 U4.33 | length 19.8
  Top Layer w0.254: U2.23 2.131,-24.5 2.619,-24.5 4.884,-26.765 4.884,-27.579 5.875,-28.569 6.654,-28.569 *1.1 6.8,-31.208 7.101,-31.509 ; U4.33 3.623,-36.262 4.822,-36.262 4.991,-36.094 4.998,-36.094 5.941,-35.151 5.941,-32.669 7.101,-31.509 ; arctory1.8 7.101,-31.509
SDA: *1.16 arctory1.7 U2.24 U4.32 | length 32.3
  Top Layer w0.254: U2.24 2.883,-23.952 5.392,-26.461 ; U4.32 3.623,-36.762 4.964,-36.762 5.179,-36.548 5.186,-36.548 6.332,-35.402 7.424,-35.402 7.661,-35.165 8.134,-34.692 8.371,-34.455 8.72,-34.106 8.72,-33.294 9.38,-32.633 10.32,-32.633 11.051,-31.902 arctory1.7 11.051,-25.668 8.796,-23.413 5.697,-23.413 4.917,-24.193 4.917,-25.755 5.392,-26.231 5.392,-26.461 ; *1.16 6.05,-27.849 5.392,-27.191 5.392,-26.461
SWCLK: JP2.2 U4.37 | length 7.1
  Top Layer w0.254: U4.37 v1(3.044,-33.485)
  Bottom Layer w0.254: JP2.2 -1.669,-31.795 -0.145,-33.319 2.878,-33.319 v1(3.044,-33.485)
SWDIO: JP2.3 U4.34 | length 8.8
  Top Layer w0.254: JP2.3 1.855,-30.83 5.443,-34.418 5.443,-35.007 4.81,-35.64 4.803,-35.64 4.68,-35.762 3.623,-35.762 U4.34
TXD: JP3.2 U4.30 | length 4.7
  Top Layer w0.254: U4.30 3.623,-37.762 5.248,-37.762 5.425,-37.586 6.332,-37.586 7.043,-38.297 JP3.2
TXD_B: HC1.2 U4.22 | length 28.1
  Top Layer w0.254: HC1.2 -14.745,-29.235 v1(-11.931,-32.049) ; U4.22 1.323,-41.608 1.323,-42.533 2.244,-43.454 v1(2.725,-43.454)
  Bottom Layer w0.254: v1(-11.931,-32.049) -10.297,-33.683 -10.297,-36.154 -8.675,-37.775 -3.75,-37.775 1.929,-43.454 v1(2.725,-43.454)
VCC3.3_1: C3.2 C22.2 C23.2 C24.2 C25.2 JP2.1 nrf.7 pad.1 R5.2 R6.2 U1.2 U4.1 U4.9 U4.24 U4.36 U4.48 | length 72.4
  Top Layer w0.254: v1(-6.139,-38.882) -6.139,-38.78 -2.99,-38.78 ; U4.1 U4.48 -3.177,-33.508 -3.177,-34.977 -1.879,-36.275 ; v1(-3.853,-49.651) v1@-3.803,-49.702 ; 0.7,-38.126 2.3,-39.727 U4.24 ; 0.925,-36.275 2.415,-34.785 U4.36
  Top Layer w0.508: U1.2 -7.922,-41.615 C3.2 -6.417,-41.358 v1(-5.825,-41.95) -5.824,-41.951 -5.824,-44.651 -5.05,-45.425 -4.532,-45.425 -4.575,-45.382 v1(-4.575,-45.35) ; R6.2 R6.2@-5.519,-49.702 ; JP2.1 -4.209,-32.58 U4.48@-3.304,-33.485 ; -2.99,-38.78 -2.625,-37.2 -1.4,-36.275 ; U4.24 2.91,-41.585
  Top Layer w0.762: R6.2@-5.519,-49.702 v1@-3.853,-49.702 ; v1@-3.803,-49.702 nrf.7@10.548,-49.702 ; -1.879,-36.275 -1.4,-36.275 ; 0.7,-38.126 v2(0.375,-36.275) 0.925,-36.275 ; 2.91,-41.585 4.575,-43.25 4.575,-49.375
  Bottom Layer w0.254: v1@-6.19,-38.932 v1(-6.139,-38.882) ; pad.1 -4.209,-32.534 JP2.1
  Bottom Layer w0.305: R5.2 -3.853,-47.888
  Bottom Layer w0.508: v1@-6.19,-38.932 -6.19,-40.583 -5.824,-40.95 v1@-5.824,-41.95 ; R5.2 -5.62,-45.995 -5.05,-45.425 -4.532,-45.425 -4.575,-45.382 v1(-4.575,-45.35) ; v1(-3.853,-49.651) -3.853,-47.888
  Bottom Layer w0.762: C24.2 v2(0.375,-36.275) C23.2
VCC3.3_2: *1.2 *1.4 *1.13 arctory1.1 arctory1.2 C4.2 C5.1 C7.1 C10.2 C11.1 HC1.4 U2.8 U2.13 U3.2 | length 84.7
  Top Layer w0.254: v1(-3.32,-23.769) -2.637,-24.452 U2.8 -1.468,-24.452 -1.268,-24.652 U2.13 -1.645,-27.68 v1(-2.533,-27.68) ; *1.13 6.55,-26.349 7.323,-27.121 7.323,-28.06 ; *1.2 7.323,-28.401 7.323,-28.06 ; *1.4 8.3,-28.174 8.008,-27.882 7.5,-27.882 7.323,-28.06 ; arctory1.2@10.752,-34.058 arctory1.2
  Top Layer w0.508: v1(-8.73,-44.673) -8.73,-47.003 -8.852,-47.125 U3.2 -7.516,-47.203 C10.2 ; *1.4 8.701,-28.825 9.175,-28.825 9.685,-28.315 v1(9.685,-27.475) ; arctory1.1 arctory1.2 ; v1(10.752,-35.199) arctory1.2@10.752,-34.058
  Bottom Layer w0.254: v1(-2.533,-27.68) v1@-2.516,-27.697 ; 9.405,-27.196 v1(9.685,-27.475) ; C7.1@10.625,-32.507 C7.1 C7.1@10.752,-32.938
  Bottom Layer w0.508: HC1.4 -14.97,-24.155 -12.3,-26.825 -11.787,-26.825 -11.931,-26.969 ; v1(-8.73,-44.673) -9.568,-44.673 -13.709,-40.533 -13.709,-28.747 -11.931,-26.969 ; v1(-3.32,-23.769) C5.1 -4.615,-23.21 -5.65,-22.175 -7.775,-22.175 -8.15,-22.55 -8.15,-26.008 -9.111,-26.969 -11.931,-26.969 ; v1(-2.533,-27.68) -2.533,-28.036 -1.972,-28.596 C4.2 ; v1@-2.516,-27.697 1.197,-27.697 1.775,-28.275 5.35,-28.275 6.225,-29.15 7.25,-29.15 8.262,-28.138 8.262,-27.196 9.405,-27.196 ; v1(9.685,-27.475) 10.625,-28.416 C7.1@10.625,-32.507 ; v1(10.752,-35.199) C7.1@10.752,-32.938
VCC_TTL_5V: D1.B JP3.4 | length 16.4
  Top Layer w0.508: D1.B -4.715,-28.072 -3.178,-28.072 -2.909,-28.341 1.066,-28.341 v1@1.678,-28.953 ; JP3.4@7.043,-34.132 7.754,-33.421 v1(7.754,-32.201)
  Bottom Layer w0.508: v1@2.025,-29.05 4.603,-29.05 v1(7.754,-32.201)
  other v1: 1.75,-28.975
VCCBAT: D1.E D6.2 D7.2 D8.2 D9.2 JP1.2 JP4.1 JP5.1 JP6.1 JP7.1 P5.1 P5.2 R7.2 R8.2 R9.2 R12.2 | length 276.1
  Top Layer w0.508: 11.973,-21.223 16.65,-25.9 v2(17.6,-25.9)
  Top Layer w0.762: JP1.2 -7.371,-24.073 D1.E
  Top Layer w1.27: -9.425,-20.774 -4.05,-20.774 ; P5.2 P5.1 -4.025,-20.749 -4.05,-20.774 ; 11.45,-20.5 11.176,-20.774 -4.05,-20.774
  Top Layer w1.3: -13.51,-51.875 16.603,-51.875
  Top Layer w1.778: JP7.1 -21.001,-56.736 D9.2 -14.825,-50.56 ; JP4.1 -20.589,-10.983 D6.2 -14.149,-17.424 ; -15.05,-17.65 -16.8,-19.4 ; -13.7,-19.4 -16.8,-19.4 ; -13.51,-51.875 -14.825,-50.56 ; 11.45,-20.5 11.621,-20.5 D7.2 20.966,-11.156 JP5.1 ; 16.603,-51.875 D8.2 19.699,-54.587 JP6.1 ; -16.8,-19.4 -18,-20.6 -18,-36.125 -15.3,-38.825 -15.3,-50.085 -14.825,-50.56
  Top Layer w3: -14.55,-17.725 -12.076,-20.199 -9.467,-20.199 JP1.2
  Bottom Layer w0.508: R12.2 -30.225,-53.825 -27.625,-50.75 -25.743,-49.621 -24.625,-49.9 -24,-51.275 -24.9,-53.3 -24.575,-55.65 -23.2,-57.175 JP7.1 ; R7.2 -29.95,-14.1 -23.7,-20.3 -18.458,-25.455 -18.313,-25.6 v2(-18.25,-25.6) ; v2(17.6,-25.9) 19.35,-25.9 25.275,-19.975 30.225,-14.2 R8.2 ; JP6.1 23.8,-56.825 25.125,-55.2 25.375,-53.175 24.625,-50.2 25.475,-49.5 28.025,-50.325 30.175,-53.1 R9.2
VIN: C1.2 C2.2 C8.2 C9.2 D1.C R10.2 U1.3 U3.3 | length 56.7
  Top Layer w0.305: C8.2 -13.5,-46.447 -13.5,-50.125 -12.9,-50.725 2.875,-50.725 v1(3,-50.6)
  Top Layer w0.508: C8.2 C8.2@-12.51,-45.428 ; C9.2 -11.113,-43.693 U3.3 -10.179,-45.379 -10.935,-45.379 -10.985,-45.428 C8.2@-12.51,-45.428 ; -8.125,-32.8 -7.028,-31.703 D1.C ; -8.095,-32.8 -8.095,-36.723 -9.688,-38.316 -11.131,-38.316 U1.3 -11.878,-39.415 C1.2 -13.132,-40.032 -13.556,-40.456 -13.556,-44.382 C8.2@-12.51,-45.428
  Bottom Layer w0.305: R10.2 3,-47.956 v1(3,-50.6)
W_CE: nrf.6 U4.25 | length 12.5
  Top Layer w0.254: U4.25 3.6,-40.519 8.948,-45.867 11.793,-45.867 nrf.6@13.088,-47.162
W_CSN: nrf.5 U4.3 | length 68.9
  Top Layer w0.254: U4.3 -5.34,-35.785 -5.8,-35.325 -5.8,-30.075 -5.15,-29.425 -3.85,-29.425 -3.4,-28.975 0.675,-28.975 1.675,-29.975 2.475,-29.975 2.8,-29.65 2.8,-27.8 v3(2.275,-27.275) ; v3(3.925,-22.475) 11.35,-22.475 15.975,-27.1 15.975,-41.15 17.9,-43.075 17.9,-47.625 17.8,-47.625 16.975,-48.45 11.37,-48.45 nrf.5
  Bottom Layer w0.254: v3(2.275,-27.275) 2.275,-23.2 3,-22.475 v3(3.925,-22.475)
W_IRQ: nrf.1 U4.29 | length 9
  Top Layer w0.254: U4.29 5.736,-38.285 5.951,-38.501 5.951,-39.821 6.393,-40.263 8.73,-40.263 nrf.1@10.333,-41.867
W_SCK: nrf.4 U4.26 | length 12.6
  Top Layer w0.254: U4.26 3.623,-39.808 4.548,-39.808 5.037,-40.297 v1(5.037,-41.066)
  Bottom Layer w0.254: v1(5.037,-41.066) 5.037,-42.234 6.23,-43.428 11.895,-43.428 nrf.4@13.088,-44.622
pads on no net: *1.3 *1.5 *1.6 *1.7 *1.14 *1.15 arctory1.6 U2.2 U2.3 U2.4 U2.5 U2.6 U2.7 U2.14 U2.15 U2.16 U2.17 U2.19 U2.21 U2.22 U4.2 U4.4 U4.14 U4.15 U4.39 U4.40 U4.43 U4.45 U4.46

## Polygon pours and split planes (outlines as drawn)
GND on Top Layer "Top Layer-No Net" (solid, remove dead copper, pour order 10): -16.9,-59.225 -14.575,-61.75 -9.45,-57.275 -5.725,-53.475 6.15,-53.5 9.875,-57.475 14.55,-61.575 17.5,-58.825 19.575,-59.45 22.15,-59.05 24.4,-57.4 25.85,-54.925 25.625,-50.625 28.4,-48.8 25.95,-45.65 20.7,-40.35 19.575,-39.25 19.875,-27.4 25.125,-22.55 28.6,-18.425 25.4,-16.35 26.025,-14.875 25.825,-12.25 24.55,-10.025 23.2,-8.725 21.425,-8.05 19.425,-7.875 17.375,-8.225 14.65,-5.9 11.25,-8.75 6.325,-14 5.975,-13.875 -5.725,-13.85 -10.625,-8.925 -14.4,-5.625 -17.05,-8.375 -19.075,-7.825 -21.325,-8.125 -23.45,-9.3 -24.925,-11.05 -25.6,-12.95 -25.35,-15.675 -25.125,-16.55 -27.8,-19.15 -24.475,-23.125 -19.5,-27.825 -19.425,-39.7 -23.425,-43.375 -27.475,-47.925 -25.2,-50.8 -25.7,-53.125 -25.325,-55.475 -23.775,-57.9 -21.5,-59.2 -19.55,-59.6 -17.075,-59.175
GND on Bottom Layer "Top Layer-No Net" (solid, remove dead copper, pour order 12): -14.4,-5.675 -9.875,-9.625 -5.725,-13.8 6.075,-13.825 8.4,-11.75 11.1,-8.9 14.625,-5.825 17.35,-8.225 19.45,-7.9 21.475,-7.975 23.25,-8.725 24.55,-10.05 25.825,-12.225 26.075,-14.925 25.525,-16.375 28.475,-18.45 24.95,-22.8 19.95,-27.375 19.7,-39.375 25.125,-44.7 28.475,-48.75 25.675,-50.625 25.9,-54.925 24.4,-57.5 22.35,-59 19.475,-59.625 17.375,-58.85 14.675,-61.625 9.375,-57 6.1,-53.45 -6.075,-53.5 -6.45,-54.3 -8.725,-56.65 -14.6,-61.725 -17.05,-59.075 -19.575,-59.65 -21.525,-59.15 -23.725,-58.075 -25.5,-55.375 -25.6,-53.125 -25.2,-50.8 -27.475,-47.85 -23.075,-43.05 -19.45,-39.725 -19.575,-27.55 -24.475,-22.975 -27.8,-19.05 -25.05,-16.425 -25.5,-14.5 -25.525,-12.925 -25,-11 -23.4,-9.325 -21.075,-8.125 -19,-7.75 -16.975,-8.325 -14.375,-5.7

## Silkscreen, mask and mechanical layers (free items; w line width, h text height)
Top Overlay:
  circle w0.254: c8.9,-33.775 r0.112
  circle w0.254: c5.3,-28.325 r0.15
  lines w0.254: 10.2,-34.1 10.2,-34.075
  text "s4" at 17.95,-15.475 h0.76 r315
  text "s4" at -18.289,-16.324 h0.76 r45
  text "mpu6050" at -2.425,-21.55 h0.76
  text "10uf" at 6.225,-23.7 h0.76
  text "3.3" at -18.775,-24.55 h0.76
  text "BAT54" at -7.75,-25.575 h0.76
  text "GND" at -18.9,-27.075 h0.76
  text "->" at -10.05,-28.675 h0.76
  text "hmc5883" at 11.2,-29.275 h0.76 r90
  text "RX3" at -18.85,-29.7 h0.76
  text "TX3" at -18.9,-32.225 h0.76
  text "ms5611" at 14.95,-34.55 h0.76 r90
  text "104" at -12.775,-37.4 h0.76
  text "IRQ" at 9.8,-40.45 h0.76
  text "104" at -6.8,-40.525 h0.76 r270
  text "key" at -19.8,-41.85 h0.76
  text "10uf" at -13.325,-41.975 h0.76 r90
  text "MISO" at 14.5,-42.425 h0.76
  text "104" at -12.85,-42.95 h0.76
  text "104" at 3.522,-43.651 h0.76
  text "MOSI" at 5.625,-44.575 h0.76
  text "104" at -7.875,-44.65 h0.76
  text "SCK" at 14.5,-45.05 h0.76
  text "CSN" at 6.025,-46.625 h0.76
  text "CE" at 14.475,-47.5 h0.76
  text "10uf" at -13.4,-47.525 h0.76 r90
  text "GND" at 14.475,-50.05 h0.76
  text "3.3" at 6.075,-50.175 h0.76
  text "300" at -7.175,-51.425 h0.76
  text "s4" at 19.175,-51.625 h0.76 r225
  text "led" at -11.425,-52.175 h0.76
  text "<-" at 10.575,-52.225 h0.76
  text "s4" at -17.975,-52.625 h0.76 r135
Bottom Overlay:
  text "led>|" at 27.7,-0.125 h0.76 r28
  text "led|<" at -25.525,-0.8 h0.76 r332
  text "1k" at 35.175,-6.125 h0.76 r60
  text "1k" at -34.3,-6.625 h0.76 r300
  text "+" at -20.225,-8.2 h1.5 r225
  text "+" at 18.58,-9.379 h1.5 r315
  text "-" at 25.463,-14.078 h1.5 r135
  text "0" at -11.775,-14.3 h0.76 r315
  text "MOS" at 17.25,-15.1 h0.76 r135
  text "-" at -24.028,-15.538 h1.5 r45
  text "100" at 14.175,-15.625 h0.76 r45
  text "10k" at -12.275,-16.65 h0.76 r315
  text "MOS" at -18.825,-16.9 h0.76 r225
  text "10k" at 19.125,-21 h0.76 r45
  text "0" at 19.8,-21.725 h0.76 r225
  text "100" at -17.925,-22.025 h0.76 r315
  text "3.3" at -4.036,-22.047 h0.76 r270
  text "GND" at 3.35,-22.05 h0.76 r270
  text "SWIO" at 0.6,-22.075 h0.76 r270
  text "SWCK" at -1.925,-22.2 h0.76 r270
  text "BAT+" at -7.55,-22.4 h0.83
  text "10uf" at 2.925,-23.375 h0.83 r90
  text "2.2uf" at 9.15,-23.575 h0.83
  text "10uf" at 0.425,-24.15 h0.83
  text "104" at -0.25,-25.65 h0.83
  text "1k" at -0.975,-27 h0.83
  text "104" at 2,-27.675 h0.83
  text "104" at 9,-29.1 h0.83
  text "104" at 12.6,-31.875 h0.83
  text "8M_3p" at -6.4,-32.525 h0.76
  text "V" at -5.3,-33.25 h0.76
  text "5v" at 9.925,-34.175 h0.76
  text "G" at -1.575,-34.425 h0.76
  text "B0" at -5.35,-34.65 h0.76
  text "104" at -3.825,-36.675 h0.83
  text "RX1" at 10.525,-36.95 h0.76
  text "104" at 3.525,-37.85 h0.83
  text "10k" at 4.125,-39 h0.83
  text "TX1" at 10.625,-39.55 h0.76
  text "104" at -3.55,-42.075 h0.83
  text "104" at -0.475,-42.55 h0.83
  text "0" at -3.425,-43.325 h0.83
  text "104" at -7.125,-43.725 h0.83
  text "GND" at 8.05,-44.375 h0.76
  text "100k" at 4.675,-45.5 h0.83
  text "10k" at -7.95,-46.8 h0.83
  text "0" at -23.9,-49.025 h0.76 r45
  text "100k" at 0.05,-49.25 h0.83
  text "10k" at -22.05,-50.15 h0.76 r45
  text "MOS" at 19.825,-50.925 h0.76 r45
  text "100" at 23.5,-51.95 h0.76 r315
  text "-" at 24.803,-52.012 h1.5 r225
  text "MOS" at -17.7,-52.675 h0.76 r315
  text "10k" at 13.5,-52.85 h0.76 r315
  text "-" at -25.488,-53.197 h1.5 r315
  text "0" at 12.3,-53.825 h0.76 r135
  text "100" at -16.6,-56.15 h0.76 r45
  text "+" at -18.605,-57.896 h1.5 r135
  text "+" at 20.475,-59.175 h1.5 r45
  text "1k" at -34.5,-62.85 h0.76 r45
  text "1k" at 35.6,-63.75 h0.76 r315
  text "led|<" at -25.275,-67.55 h0.76 r30
  text "led>|" at 27.575,-68.575 h0.76 r330
Mechanical 1:
  lines w0.254: -48.401,-69.664 -46.916,-71.149 ; -48.402,2.148 ccw(c-43.261,5.173) -46.322,0.054 ; -48.372,-69.635 cw(c-43.253,-72.696) -46.278,-67.556 ; -48.373,2.12 -46.833,3.66 ; -46.911,-71.152 ccw(c-41.038,-74.961) -45.958,-79.94 ; -46.887,3.707 cw(c-40.996,7.489) -45.966,12.419 ; -46.307,-67.585 -44.817,-69.075 ; -46.294,0.026 -44.746,1.573 ; -46.179,-77.986 ccw(c-41.038,-74.961) -44.099,-80.081 ; -46.15,-78.015 -45.642,-77.508 ; -46.124,10.521 -45.61,10.006 ; -46.095,10.549 cw(c-40.976,7.488) -44.001,12.629 ; -45.969,-79.951 ccw(c-41.038,-74.982) -37.257,-80.872 ; -45.955,12.408 cw(c-40.976,7.488) -37.167,13.361 ; -45.65,-77.401 cw(c-41,-74.964) -38.563,-70.314 ; -45.636,9.926 ccw(c-40.986,7.488) -38.549,2.839 ; -45.238,-79.196 -45.238,-79.161 ; -45.211,11.688 -45.176,11.688 ; -44.819,-69.071 cw(c-41.038,-74.961) -39.108,-68.233 ; -44.746,1.573 ccw(c-40.986,7.478) -39.046,0.753 ; -44.071,-80.109 -43.581,-79.619 ; -44.03,12.6 -43.473,12.043 ; -43.476,-79.621 ccw(c-41.038,-74.971) -36.388,-72.534 ; -43.416,12.1 cw(c-40.979,7.45) -36.329,5.013 ; -39.093,-68.182 cw(c24.072,-89.971) -19.747,-39.528 -19.78,-27.862 cw(c24.134,22.498) -39.042,0.74 ; -38.547,2.944 -37.951,2.348 ccw(c-40.976,7.488) -35.857,4.427 -36.435,5.006 ; -38.492,-70.358 -37.977,-69.842 cw(c-41.038,-74.961) -35.898,-71.936 -36.393,-72.432 ; -37.21,-80.818 -35.67,-82.358 ; -37.164,13.366 -35.679,14.851 ; -35.698,-82.387 ccw(c-38.723,-77.246) -33.604,-80.308 ; -35.65,14.822 cw(c-38.711,9.703) -33.571,12.728 ; -35.123,-78.731 ccw(c-41.028,-74.972) -34.302,-73.031 ; -35.123,-78.731 -33.575,-80.279 ; -35.09,11.267 -33.599,12.757 ; -35.085,11.27 cw(c-40.976,7.488) -34.247,5.558 ; -34.29,-73.027 ccw(c-56.048,-9.851) -5.618,-53.685 ; -34.197,5.543 cw(c-55.986,-57.622) -5.625,-13.708 6.018,-13.708 cw(c56.379,-57.622) 34.59,5.543 ; -25.562,-16.332 cw(c5.734,11.189) -34.736,1.239 cw(c-44.686,-39.231) -17.165,-7.936 ; -25.561,-51.088 ccw(c5.735,-78.609) -34.735,-68.659 ccw(c-44.685,-28.189) -17.164,-59.484 ; -25.551,-51.091 ccw(c-19.44,-53.364) -17.168,-59.475 ; -25.552,-16.329 cw(c-19.441,-14.056) -17.169,-7.946 ; -19.842,-39.611 -19.836,-39.605 ; -5.65,-53.683 5.993,-53.683 ; 6.044,-53.734 5.993,-53.683 ; 17.533,-59.455 ccw(c45.054,-28.16) 35.104,-68.63 ccw(c-5.366,-78.58) 25.93,-51.059 ; 17.537,-59.446 ccw(c19.809,-53.335) 25.92,-51.062 ; 17.558,-7.936 cw(c45.079,-39.231) 35.129,1.239 cw(c-5.341,11.189) 25.955,-16.332 ; 17.562,-7.946 cw(c19.834,-14.056) 25.945,-16.329 ; 20.204,-27.841 20.229,-27.816 ; 33.938,-80.119 ccw(c39.079,-77.094) 36.018,-82.213 ; 33.963,12.728 cw(c39.104,9.703) 36.043,14.822 ; 33.967,-80.148 35.457,-78.658 ; 33.992,12.757 35.482,11.267 ; 34.565,-72.934 cw(c56.354,-9.769) 5.993,-53.683 ; 34.615,-72.949 ccw(c41.344,-74.879) 35.453,-78.661 ; 34.64,5.558 cw(c41.369,7.488) 35.478,11.27 ; 36.047,-82.242 37.532,-80.757 ; 36.072,14.851 37.557,13.366 ; 36.696,-72.404 ccw(c41.346,-74.841) 43.784,-79.491 ; 36.721,5.013 cw(c41.371,7.45) 43.809,12.1 ; 36.803,-72.397 36.225,-71.818 cw(c41.344,-74.879) 38.319,-69.739 38.915,-70.335 ; 36.828,5.006 36.25,4.427 ccw(c41.369,7.488) 38.344,2.348 38.94,2.944 ; 37.535,-80.752 ccw(c41.344,-74.879) 46.323,-79.8 ; 37.56,13.361 cw(c41.369,7.488) 46.348,12.408 ; 38.917,-70.23 cw(c41.354,-74.879) 46.004,-77.317 ; 38.942,2.839 ccw(c41.379,7.488) 46.029,9.926 ; 39.41,-68.131 ccw(c-23.766,-89.889) 20.148,-39.529 20.173,-27.862 ccw(c-23.741,22.498) 39.435,0.74 ; 39.413,-68.144 cw(c41.354,-74.869) 45.114,-68.964 46.661,-67.417 ; 39.438,0.753 ccw(c41.379,7.478) 45.139,1.573 46.686,0.026 ; 43.841,-79.434 44.398,-79.991 ; 43.866,12.043 44.423,12.6 ; 44.369,-80.02 ccw(c41.344,-74.879) 46.463,-77.941 ; 44.394,12.629 cw(c41.369,7.488) 46.488,10.549 ; 45.544,-79.079 45.579,-79.079 ; 45.569,11.688 45.604,11.688 ; 45.978,-77.397 46.492,-77.912 ; 46.003,10.006 46.517,10.521 ; 46.333,-79.81 ccw(c41.364,-74.88) 47.255,-71.098 ; 46.358,12.419 cw(c41.389,7.489) 47.28,3.707 ; 46.69,-67.445 cw(c43.629,-72.565) 48.77,-69.54 ; 46.715,0.054 ccw(c43.654,5.173) 48.795,2.148 ; 47.201,-71.051 48.741,-69.511 ; 47.226,3.66 48.766,2.12 ; -8.2,-18.625 -5.575,-18.625 -5.575,-15.125 -8.2,-15.125 -8.2,-18.625 ; 6,-18.675 8.625,-18.675 8.625,-14.975 6,-14.975 6,-18.675
Mechanical 13:
  circle w0.254: c41.4,7.529 r28
  circle w0.254: c-41.05,7.475 r28
  circle w0.254: c41.35,-74.875 r28
  circle w0.254: c-41.025,-74.975 r28
  lines w0.254: -4.8,-4.675 -4.8,-6.425 5.2,-6.425 5.2,-4.675 -4.775,-4.675 ; -3.675,-13.675 -3.675,-6.5 ; 3.825,-13.675 3.825,-6.475 ; -9.8,-20.775 10.2,-20.775 10.2,-13.725 -9.8,-13.725 -9.8,-20.775
Mechanical 15:
  lines w0.254: -48.103,-65.789 -46.307,-67.585 ; -47.91,-76.168 -46.125,-77.975 ; -47.744,-66.866 -46.307,-67.585 ; -47.558,-77.248 -46.125,-77.975 ; -47.025,-66.148 -46.307,-67.585 ; -46.835,-76.534 -46.125,-77.975 ; -46.487,-67.764 -46.127,-67.405 ; -46.306,-78.154 -45.944,-77.796 ; -44.996,-69.254 -44.637,-68.895 ; -44.231,-80.254 -43.869,-79.896 ; -44.098,-70.512 -44.817,-69.075 ; -43.38,-69.793 -44.817,-69.075 ; -43.34,-81.516 -44.05,-80.075 ; -43.021,-70.871 -44.817,-69.075 ; -42.617,-80.802 -44.05,-80.075 ; -42.265,-81.882 -44.05,-80.075 ; -41.533,-73.451 -41.025,-74.975 ; -41.508,5.926 -41,7.45 ; -41.279,-74.975 -40.771,-74.975 ; -41.254,7.45 -40.746,7.45 ; -41.18,7.27 -40.82,7.63 ; -41.025,-74.721 -41.025,-75.229 ; -41.015,-41.786 -41.025,-74.975 ; -41.01,-25.739 -41,7.45 ; -40.753,-74.946 -40.392,-75.304 ; -40.517,-73.451 -41.025,-74.975 ; -40.492,5.926 -41,7.45 ; -40.381,-72.507 -38.675,-70.625 ; -40.281,6.013 -41,7.45 ; -40.075,-71.413 -38.675,-70.625 ; -39.86,-73.685 -40.572,-75.125 ; -39.563,6.732 -41,7.45 ; -39.502,-74.464 -41.025,-74.975 ; -39.5,-75.48 -41.025,-74.975 ; -39.322,-72.095 -38.675,-70.625 ; -39.138,-74.401 -40.572,-75.125 ; -38.863,-70.454 -38.487,-70.796 ; -38.138,-69.654 -37.762,-69.996 ; -37.461,-84.207 -35.675,-82.4 ; -37.303,-68.355 -37.95,-69.825 ; -37.108,-83.127 -35.675,-82.4 ; -36.55,-69.037 -37.95,-69.825 ; -36.385,-83.841 -35.675,-82.4 ; -36.244,-67.943 -37.95,-69.825 ; -35.856,-82.221 -35.494,-82.579 ; -33.731,-80.071 -33.369,-80.429 ; -32.84,-78.809 -33.55,-80.25 ; -32.117,-79.523 -33.55,-80.25 ; -31.764,-78.443 -33.55,-80.25 ; -7.861,-74.915 -41.025,-74.975 ; -5.859,-27.681 -41,7.45 ; -5.517,-39.78 -40.572,-75.125 ; 6.209,-39.744 41.35,-74.875 ; 6.32,-27.845 41.375,7.5 ; 8.186,-74.885 41.35,-74.825 ; 39.825,-74.32 41.35,-74.825 ; 39.827,-75.336 41.35,-74.825 ; 39.913,-74.157 41.35,-74.875 ; 39.941,6.776 41.375,7.5 ; 40.631,-73.438 41.35,-74.875 ; 40.663,6.06 41.375,7.5 ; 40.842,-73.351 41.35,-74.875 ; 40.867,5.976 41.375,7.5 ; 41.096,-74.875 41.604,-74.875 ; 41.121,7.5 41.629,7.5 ; 41.17,-75.055 41.53,-74.695 ; 41.195,7.679 41.555,7.321 ; 41.35,-74.571 41.35,-75.079 ; 41.36,-41.711 41.35,-74.875 ; 41.365,-25.664 41.375,7.5 ; 41.858,-73.351 41.35,-74.875 ; 41.883,5.976 41.375,7.5
  text "116.443 (mm)" at -6.325,-28.507 h1.52 r315.01
  text "116.371 (mm)" at -4.689,-40.243 h1.52 r45.24
  text "82.375 (mm)" at 42.274,-41.458 h1.52 r89.98
  text "82.425 (mm)" at -40.101,-41.533 h1.52 r89.98
  text "2.108 (mm)" at -53.013,-66.05 h1.52 r315
  text "82.375 (mm)" at -7.606,-75.828 h1.52 r0.1
  text "2.952 (mm)" at -52.614,-76.61 h1.52 r314.66
  text "1.08 (mm)" at -39.712,-77.215 h1.52 r47.82
  text "3.023 (mm)" at -36.938,-88.88 h1.52 r45.34

## Dimensions
-45.636,9.926 to -99.292,-168.173 on Mechanical 15
10.2,-13.725 to 10.2,-20.775 on Mechanical 15
-9.8,-13.725 to 10.2,-13.725 on Mechanical 15